# EAGLE board untitled (EAGLE 5.08)
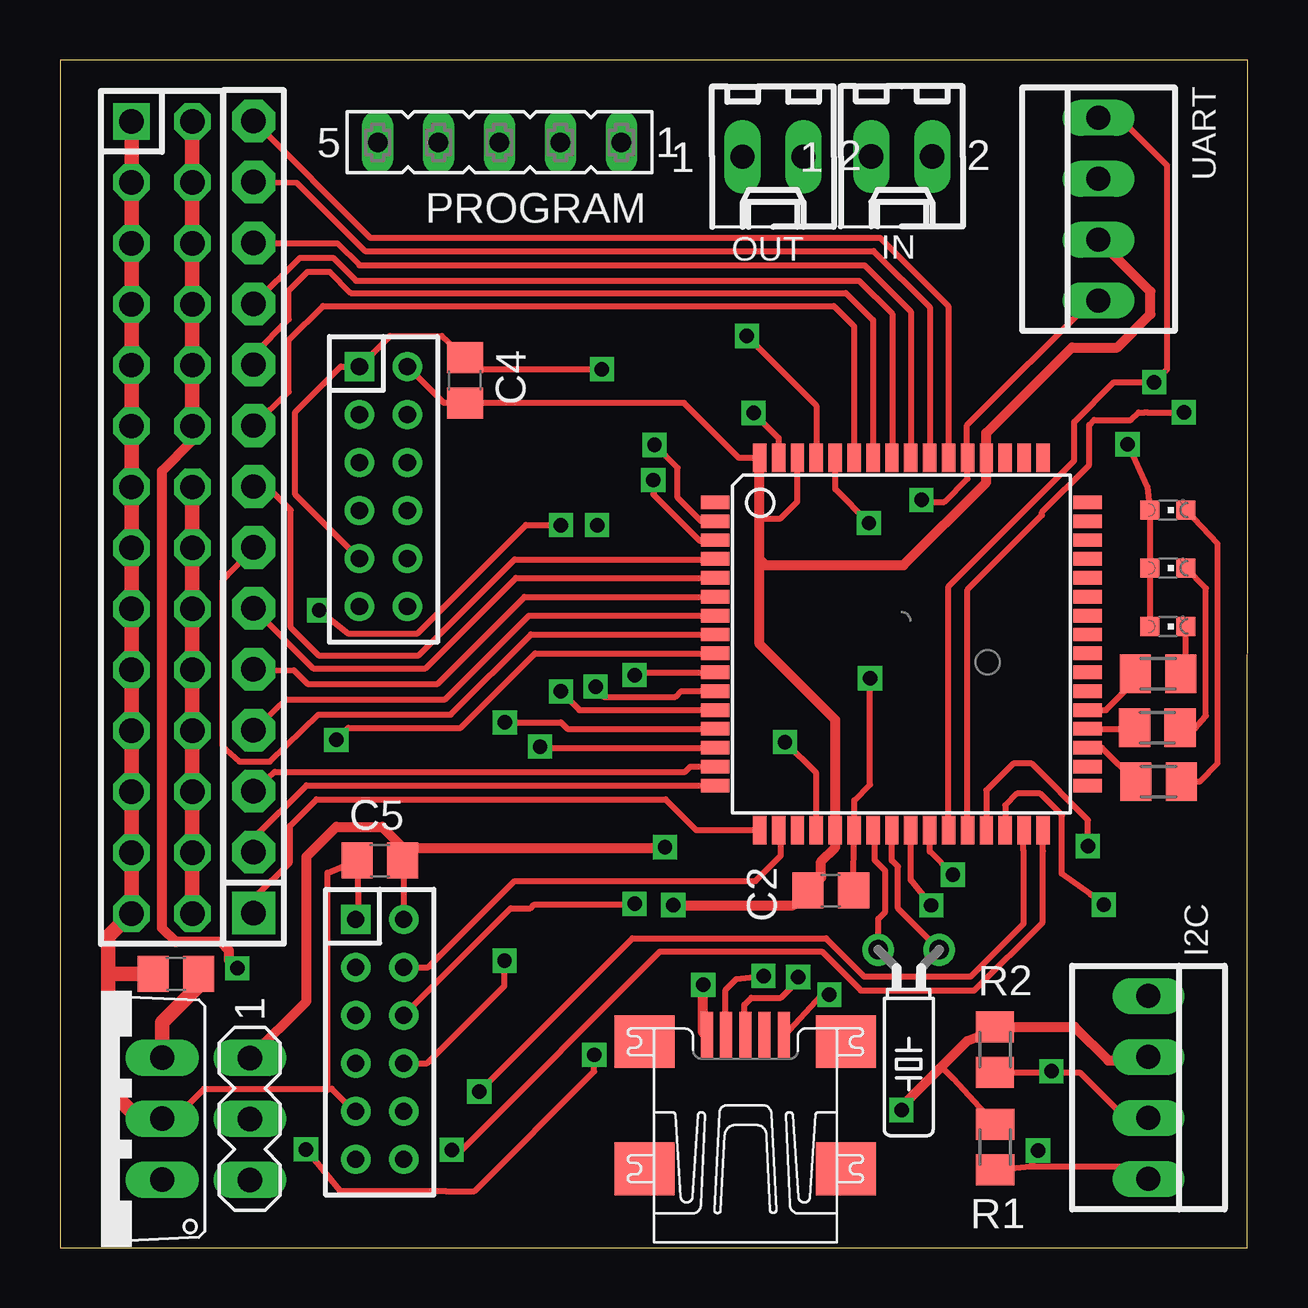
[diagram p0: board, top side]
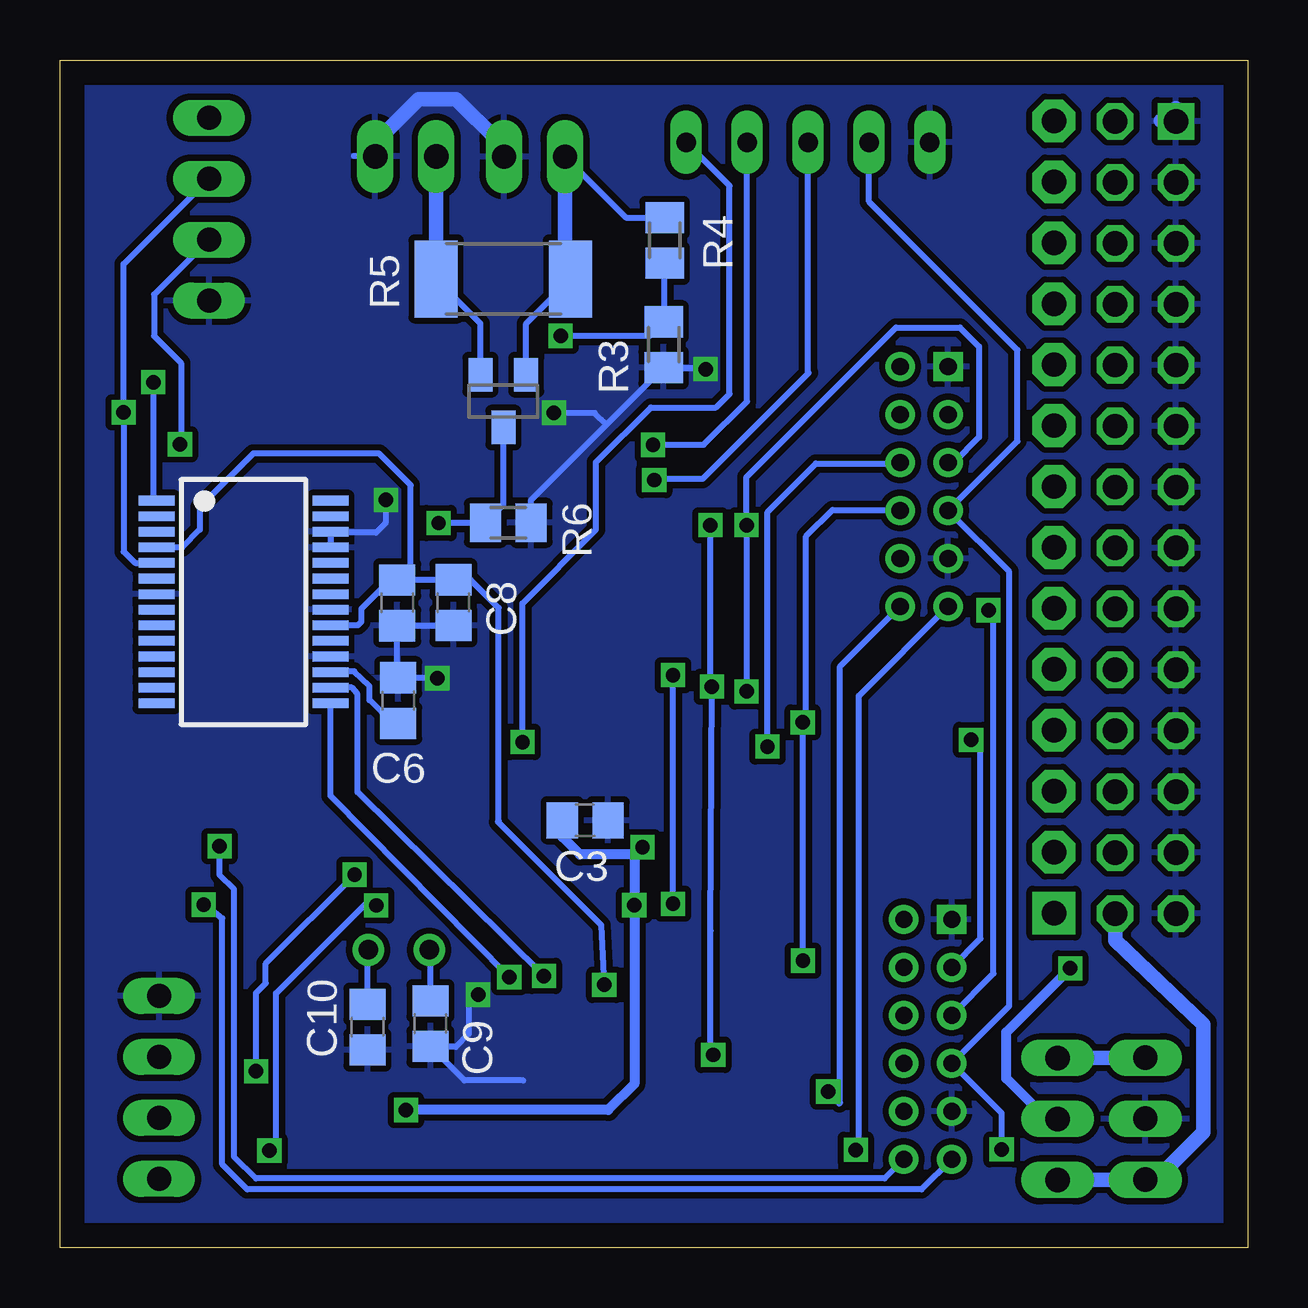
[diagram p1: board, bottom side, seen from below]

Size 49.5 x 49.51 mm. Coordinates in mm from the lower left corner, seen from the top.
Outline: 0,0.01 49.49,0 49.5,49.51 0,49.51 0,0.01
Copper layers (1*16): Top 0.035mm / dielectric 1.5mm / Bottom 0.035mm
Design rules "8mils": minimum track width 8mil, minimum drill 0.6mm, track to track 8mil, track to pad 8mil, pad to pad 8mil, via to via 8mil, smd to smd 8mil, copper to edge 40mil, drill to drill 10mil, minimum pad ring 10mil, minimum via ring 8mil, stop-mask expansion 0mil, vias tented up to drill 0mil, thermal gap 10mil

## Footprints (pad centres in the part's own frame; a part is rotated, then mirrored left to right if it is on the bottom)
C0805 = smd 1.3 x 1.5: 1 -0.95,0; 2 0.95,0
22-23-2041 = drill 1 long: 1 -3.81,0; 2 -1.27,0; 3 1.27,0; 4 3.81,0
TQFP64 = smd 1.194 x 0.559: 1 -7.76,5.905; 2 -7.76,5.118; 3 -7.76,4.331; 4 -7.76,3.543; 5 -7.76,2.756; 6 -7.76,1.968; 7 -7.76,1.181; 8 -7.76,0.394; 9 -7.76,-0.394; 10 -7.76,-1.181; 11 -7.76,-1.968; 12 -7.76,-2.756; 13 -7.76,-3.543; 14 -7.76,-4.331; 15 -7.76,-5.118; 16 -7.76,-5.905; 33 7.76,-5.905; 34 7.76,-5.118; 35 7.76,-4.331; 36 7.76,-3.543; 37 7.76,-2.756; 38 7.76,-1.968; 39 7.76,-1.181; 40 7.76,-0.394; 41 7.76,0.394; 42 7.76,1.181; 43 7.76,1.968; 44 7.76,2.756; 45 7.76,3.543; 46 7.76,4.331; 47 7.76,5.118; 48 7.76,5.905 | smd 0.559 x 1.194: 17 -5.905,-7.76; 18 -5.118,-7.76; 19 -4.331,-7.76; 20 -3.543,-7.76; 21 -2.756,-7.76; 22 -1.968,-7.76; 23 -1.181,-7.76; 24 -0.394,-7.76; 25 0.394,-7.76; 26 1.181,-7.76; 27 1.968,-7.76; 28 2.756,-7.76; 29 3.543,-7.76; 30 4.331,-7.76; 31 5.118,-7.76; 32 5.905,-7.76; 49 5.905,7.76; 50 5.118,7.76; 51 4.331,7.76; 52 3.543,7.76; 53 2.756,7.76; 54 1.968,7.76; 55 1.181,7.76; 56 0.394,7.76; 57 -0.394,7.76; 58 -1.181,7.76; 59 -1.968,7.76; 60 -2.756,7.76; 61 -3.543,7.76; 62 -4.331,7.76; 63 -5.118,7.76; 64 -5.905,7.76
TO220V = drill 1.016 long: 1 -2.54,-2.54; 2 0,-2.54; 3 2.54,-2.54
SSOP28 = smd 0.4 x 1.5: 1 -4.225,-3.625; 2 -3.575,-3.625; 3 -2.925,-3.625; 4 -2.275,-3.625; 5 -1.625,-3.625; 6 -0.975,-3.625; 7 -0.325,-3.625; 8 0.325,-3.625; 9 0.975,-3.625; 10 1.625,-3.625; 11 2.275,-3.625; 12 2.925,-3.625; 13 3.575,-3.625; 14 4.225,-3.625; 15 4.225,3.625; 16 3.575,3.625; 17 2.925,3.625; 18 2.275,3.625; 19 1.625,3.625; 20 0.975,3.625; 21 0.325,3.625; 22 -0.325,3.625; 23 -0.975,3.625; 24 -1.625,3.625; 25 -2.275,3.625; 26 -2.925,3.625; 27 -3.575,3.625; 28 -4.225,3.625
6410-02 = drill 1.016 long: 1 1.27,0; 2 -1.27,0
DIL-2MM-2X06 = drill 0.711 square: 1 -5,-1 | drill 0.711 round: 2 -5,1; 3 -3,-1; 4 -3,1; 5 -1,-1; 6 -1,1; 7 1,-1; 8 1,1; 9 3,-1; 10 3,1; 11 5,-1; 12 5,1
DIL-100-2X14 = drill 1.016 square: 1 -16.51,-1.27 | drill 1.016 octagon: 2 -16.51,1.27; 3 -13.97,-1.27; 4 -13.97,1.27; 5 -11.43,-1.27; 6 -11.43,1.27; 7 -8.89,-1.27; 8 -8.89,1.27; 9 -6.35,-1.27; 10 -6.35,1.27; 11 -3.81,-1.27; 12 -3.81,1.27; 13 -1.27,-1.27; 14 -1.27,1.27; 15 1.27,-1.27; 16 1.27,1.27; 17 3.81,-1.27; 18 3.81,1.27; 19 6.35,-1.27; 20 6.35,1.27; 21 8.89,-1.27; 22 8.89,1.27; 23 11.43,-1.27; 24 11.43,1.27; 25 13.97,-1.27; 26 13.97,1.27; 27 16.51,-1.27; 28 16.51,1.27
SIP-100-14-40 = drill 1.016 pad 1.778 square: 1 -16.51,0 | drill 1.016 pad 1.778 octagon: 2 -13.97,0; 3 -11.43,0; 4 -8.89,0; 5 -6.35,0; 6 -3.81,0; 7 -1.27,0; 8 1.27,0; 9 3.81,0; 10 6.35,0; 11 8.89,0; 12 11.43,0; 13 13.97,0; 14 16.51,0
CHIPLED_0603 = smd 0.8 x 0.8: A 0,-0.75; C 0,0.75
FE05-1 = drill 0.813 long: 1 -5.08,0; 2 -2.54,0; 3 0,0; 4 2.54,0; 5 5.08,0
TC26H = drill 0.813 round: 1 -1.27,0; 2 1.27,0
M0805 = smd 1.3 x 1.6: 1 -0.95,0; 2 0.95,0
R2512 = smd 1.8 x 3.2: 1 -2.8,0; 2 2.8,0
MA03-1 = drill 1.016 long: 1 -2.54,0; 2 0,0; 3 2.54,0
SOT23 = smd 1 x 1.4: 1 1.27,3.64; 2 2.22,1.44; 3 0.32,1.44
UX60A-MB-5ST = smd 2 x 0.5: 1 2.25,1.6; 2 2.25,0.8; 3 2.25,0; 4 2.25,-0.8; 5 2.25,-1.6 | smd 2.2 x 2.5: M1 -3.3,-4.2; M2 -3.3,4.2; M3 2,4.2; M4 2,-4.2

## Placement (x,y rotation side)
C1  [C0805]  4.83,11.42 0 top
C2  [C0805]  32.13,14.89 180 top
C3  [C0805]  27.61,17.82 180 bottom
C4  [C0805]  16.88,36.16 270 top
C5  [C0805]  13.33,16.14 0 top
C6  [C0805]  35.4,22.81 270 bottom
C7  [C0805]  35.44,26.88 90 bottom
C8  [C0805]  33.1,26.89 90 bottom
C9  18pF  [C0805]  34.06,9.34 90 bottom
C10  18pF  [C0805]  36.68,9.2 90 bottom
I2C  22-23-2041  [22-23-2041]  45.37,6.68 270 top
IC1  ATMEGA2561-16A  [TQFP64]  35.07,25.17 0 top
IC2  LM3940IT-3.3  [TO220V]  1.72,5.38 90 top
IC3  FT232RL  [SSOP28]  41.85,26.92 270 bottom
IN  22-27-2021-02  [6410-02]  35.09,45.49 180 top
J1  J-12-2MM-2X06  [DIL-2MM-2X06]  13.33,8.69 270 top
J2  J-12-2MM-2X06  [DIL-2MM-2X06]  13.48,31.73 270 top
J3  F-2X14-DIL-100  [DIL-100-2X14]  4.25,30.44 270 top
J4  F-1X14-SIP-100-40  [SIP-100-14-40]  8.07,30.46 90 top
LED1  [CHIPLED_0603]  46.18,30.75 270 top
LED2  [CHIPLED_0603]  46.18,28.33 270 top
LED3  [CHIPLED_0603]  46.18,25.9 270 top
OUT  22-27-2021-02  [6410-02]  29.72,45.48 180 top
PROGRAM  [FE05-1]  18.32,46.08 180 top
Q2  16MHz  [TC26H]  35.38,12.42 180 top
R1  [M0805]  38.98,4.2 90 top
R2  [M0805]  38.97,8.26 90 top
R3  [M0805]  24.34,37.64 270 bottom
R4  [M0805]  24.3,41.99 90 bottom
R5  [R2512]  31.02,40.38 0 bottom
R6  [M0805]  30.81,30.22 0 bottom
R7  [M0805]  45.79,19.43 180 top
R8  [M0805]  45.74,21.67 180 top
R9  [M0805]  45.77,23.93 180 top
SV2  [MA03-1]  7.91,5.37 270 top
U$2  ZXCT1009  [SOT23]  29.75,37.83 180 bottom
UART  22-23-2041  [22-23-2041]  43.29,43.29 90 top
X2  MINI-USB-UX60A-MB-5ST  [UX60A-MB-5ST]  28.57,6.59 90 top

## Library data of the parts
C1-C10 R1-R9 = rcl
I2C IN OUT UART = con-molex
IC1 = avr
IC2 = linear
IC3 = ftdichip
J1-J4 = con-headers-jp
LED1-LED3 = led
PROGRAM = con-lsta
Q2 = crystal
SV2 = con-lstb
U$2 = dla
X2 = con-hirose

## Nets
+3V3: C1.2 C2.2 C3.2 C4.2 C5.2 I2C.2 IC1.21 IC1.52 IC1.62 IC1.64 IC2.3 J1.2 J2.2 LED1.A LED2.A LED3.A R1.2 R2.2 SV2.1 UART.2
+5V: IC2.1 J3.14 J3.16 J3.18 J3.20 J3.22 J3.24 J3.26 J3.28 SV2.3
GND: C1.1 C2.1 C3.1 C4.1 C5.1 C6.1 C7.1 C8.1 C9.1 C10.1 I2C.1 IC1.22 IC1.53 IC1.63 IC2.2 IC3.7 IC3.18 IC3.21 IC3.25 IC3.26 IN.2 J1.1 J1.9 J2.1 J2.9 J3.1 J3.3 J3.5 J3.7 J3.9 J3.11 J3.13 J3.15 J3.17 J3.19 J3.21 J3.23 J3.25 J3.27 OUT.2 PROGRAM.5 R3.2 R6.2 UART.1 X2.5
N$1: IC1.3 PROGRAM.3
N$2: IC1.12 J1.5 J2.5
N$3: IC1.9 J1.3
N$4: IC1.18 J1.4
N$5: IC1.10 J1.6
N$6: IC1.2 PROGRAM.2
N$7: I2C.3 IC1.26 R2.1
N$8: IC1.14 J2.6
N$9: IC1.11 J1.7 J2.7 PROGRAM.4
N$10: I2C.4 IC1.25 R1.1
N$11: C9.2 IC1.23 Q2.2
N$12: IC1.4 J4.8
N$13: IC1.28 IC3.5 UART.3
N$14: IC1.17 J4.1
N$15: IC1.16 J4.2
N$16: IC1.15 J4.3
N$17: IC1.8 J4.7
N$18: IC1.7 J4.4
N$19: IC1.6 J4.5
N$20: IC1.61 R3.1 R4.1
N$21: IN.1 R5.1 U$2.2
N$22: IC1.58 J4.10
N$23: IC1.60 R6.1 U$2.1
N$24: OUT.1 R4.2 R5.2 U$2.3
N$25: IC1.59 J4.9
N$26: IC1.29 J1.12
N$27: IC1.30 J1.11
N$28: IC1.57 J4.11
N$29: IC1.56 J4.12
N$30: IC1.31 J2.12
N$31: IC1.55 J4.13
N$32: IC1.54 J4.14
N$33: IC1.27 IC3.1 UART.4
N$34: IC1.32 J2.11
N$35: IC1.20 PROGRAM.1
N$36: IC1.13 J1.8 J2.8
N$37: IC3.15 X2.3
N$38: J3.2 J3.4 J3.6 J3.8 J3.10 J3.12 SV2.2
N$39: C10.2 IC1.24 Q2.1
N$40: C7.2 C8.2 IC3.4 IC3.20 X2.1
N$41: C6.2 IC3.17
N$42: IC3.16 X2.2
N$43: IC1.35 R7.2
N$44: IC1.5 J4.6
N$45: LED1.C R7.1
N$46: LED2.C R8.1
N$47: LED3.C R9.1
N$48: IC1.36 R8.2
N$49: IC1.37 R9.2

## Tracks (layer width: path | path; a pad name or v marks a point on that pad's centre or on a via)
+3V3  (via drill 0.6)
  Top 0.203: C5.2 14.33,16.15
  Top 0.254: J2.2 16,35.21 C4.2 26.02,35.21 28.31,32.92 IC1.64 | 14.33,16.65 14.33,16.15 J1.2 | C5.2 14.61,16.67 | IC1.21 32.3,17.4 | C2.2 31.18,14.46 | 38.53,9.21 38.6,9.21 R2.2 | R1.2 38.8,5.29 | R1.2 38.68,5.29 | R1.2 37.23,7.06 37.22,7.06 36.78,7.5 36.77,7.56 | IC1.62 30.74,31.1 30.04,30.4 29.2,30.4 29.16,30.43 | v44.5,33.49 45.33,31.71 LED1.A LED2.A LED3.A
  Top 0.406: 14.33,16.65 13.43,17.55 11.52,17.55 10.28,16.31 10.28,10.28 SV2.1 | 14.61,16.67 25.19,16.67 v25.22,16.7 | v25.56,14.28 30.57,14.28 C2.2 31.72,15.43 31.72,16.1 32.31,16.69 IC1.21 32.32,22.01 29.16,25.17 29.16,28.7 | 38.6,9.21 38.6,8.95 | I2C.2 44.54,7.81 43.69,7.81 42.29,9.21 R2.2 38.45,8.88 37.82,8.62 36.77,7.56 34.94,5.74 v35.08,5.74 | 29.16,28.7 29.16,30.43 IC1.64 | 29.16,28.7 29.41,28.45 35.16,28.45 38.61,31.9 IC1.52 38.61,33.96 42.18,37.53 44.07,37.53 45.45,38.91 45.45,39.86 UART.2
  Top 0.61: C1.2 5.78,10.92 4.26,9.4 IC2.3
  Bottom 0.203: 25.59,16.23 v25.22,16.7
  Bottom 0.254: C3.2 28.56,17.15 | 25.56,16.25 25.59,16.23 25.59,16.22 | UART.2 45.58,39.73 45.58,38.01 44.45,36.88 44.45,33.45 v44.5,33.49
  Bottom 0.406: v25.22,16.7 25.53,16.39 | 25.53,16.39 27.83,16.39 28.56,17.12 C3.2 | 25.53,16.39 25.56,16.36 v25.56,14.28 25.56,6.83 26.65,5.74 v35.08,5.74
  Bottom 0.61: IC2.3 SV2.1
+5V
  Top 0.203: J3.24 | J3.20 | J3.22 | J3.18 | J3.16
  Top 0.61: J3.28 J3.26 J3.24 J3.22 J3.20 J3.18 J3.16 J3.14
  Bottom 0.61: J3.28 5.52,12.82 1.84,9.32 1.84,4.82 3.82,2.84 IC2.1 SV2.3
GND  (via drill 0.6)
  Top 0.254: IC1.63 29.95,33.76 v28.91,34.8 | UART.1 43,39.48 37.81,34.29 37.81,32.95 IC1.53 37.83,32.06 36.86,31.09 35.99,31.09 v35.91,31.17 | 11.15,6.57 11.15,15.63 C5.1 12.45,13.81 J1.1 | C2.1 33.09,17.4 IC1.22 33.11,18.65 33.77,19.31 v33.77,23.74 | 30.21,8.96 X2.5 31.74,10.55 v32.07,10.55 | J2.9 9.81,31.39 9.81,34.84 11.7,36.73 J2.1 13.76,38.01 15.91,38.01 C4.1 17.28,36.64 17.3,36.62 v22.59,36.62 | IC2.2 4.76,5.38 6.01,6.63 11.33,6.63 12.27,5.69 J1.9
  Top 0.61: J3.1 J3.25 J3.27 2.02,12.97 2.02,11.44 | 2.02,7.81 2.02,11.44 | IC2.2 3.29,5.38 2.02,6.65 2.02,7.93 2,7.95 | C1.1 2.04,11.42 2.02,11.44
  Bottom 0.254: R6.2 29.86,31.17 26.72,34.31 | 26.72,34.31 R3.2 22.21,36.69 | v28.91,34.8 27.21,34.8 26.72,34.31 | IN.2 37.26,45.51 | C8.1 C7.1 35.44,23.8 C6.1 35.38,23.74 v33.77,23.74 | IC3.25 IC3.26 38.19,29.81 36.33,29.81 35.91,30.23 v35.91,31.17 | 30.18,6.97 32.64,6.97 C9.1 | v32.07,10.55 32.03,10.63 32.46,10.2 32.46,8.91 33,8.37 34.03,8.37 34.05,8.35 34.13,8.35 | v22.59,36.62 22.62,36.65 24.33,36.65
  Bottom 0.61: IN.2 36.36,46.07 34.55,47.88 32.99,47.88 31.25,46.14 31.25,45.74 OUT.2 | J3.1 2.98,47.51 | 3.61,46.98 2.99,46.98 | 13.19,46.59 13.19,46.08
  pour Bottom (isolate 0.254): 0.07,49.93 0.07,0.14 50.01,0.14 50.01,49.93 49.75,49.93
N$1  (via drill 0.6)
  Top 0.254: v24.73,32 24.73,31.4 26.66,29.47 27.28,29.47 IC1.3
  Bottom 0.254: v24.73,32 24.68,32.05 22.71,32.05 18.29,36.47 18.32,36.5 PROGRAM.3
N$2  (via drill 0.6)
  Top 0.254: IC1.12 21.66,22.41 v20.88,23.19 | v10.8,26.57 12.01,25.61 14.91,25.61 19.43,30.12 v20.88,30.12
  Bottom 0.254: J1.5 10.59,11.43 10.59,26.33 | 10.59,26.33 10.59,26.55 | v20.88,23.19 v20.88,30.12 v20.89,30.13 20.89,32.12 14.65,38.36 11.98,38.36 11.19,37.57 11.19,33.79 12.25,32.73 J2.5 | v10.8,26.57 10.75,26.49 10.59,26.33
N$3  (via drill 0.6)
  Top 0.254: IC1.9 19.81,24.78 16.7,21.67 12.02,21.67 v11.52,21.17
  Bottom 0.254: J1.3 11.13,12.89 11.13,20.73 11.52,21.12 v11.52,21.17
N$4
  Top 0.254: J1.4 15.35,11.69 18.95,15.29 28.99,15.29 30.05,16.35 30.05,17.31 IC1.18
N$5  (via drill 0.6)
  Top 0.254: IC1.10 24.07,23.99 v23.95,23.87 | J1.6 18.79,14.15 19.61,14.15 19.77,14.31 23.92,14.31 v23.95,14.34
  Bottom 0.254: v23.95,14.34 v23.95,23.87
N$6  (via drill 0.6)
  Top 0.254: IC1.2 26.72,30.29 25.74,31.27 25.74,32.51 v24.78,33.47
  Bottom 0.254: v24.78,33.47 22.67,33.47 20.86,35.28 PROGRAM.2
N$7  (via drill 0.6)
  Top 0.254: IC1.26 36.25,16.52 v37.22,15.55 | R2.1 41.33,7.31 | 41.33,7.31 42.5,7.31 44.4,5.41 I2C.3 | 41.33,7.31 v41.33,7.36
  Bottom 0.254: v37.22,15.55 40.92,11.85 40.92,11.03 41.33,10.62 v41.33,7.36
N$8  (via drill 0.6)
  Top 0.254: IC1.14 20.06,20.84 v20.01,20.89
  Bottom 0.254: J2.6 14.52,32.69 17.99,32.69 20.01,30.67 v20.01,20.89
N$9  (via drill 0.6)
  Top 0.254: v22.33,23.39 22.67,22.96 25.65,22.96 25.89,23.2 IC1.11 | v10.25,4.1 11.67,2.37 16.07,2.37 16.08,2.36 17.28,2.36 22.27,7.35 v22.27,8.04
  Bottom 0.254: v22.39,30.12 22.39,23.26 v22.33,23.39 22.38,13.21 22.38,8.03 v22.27,8.04 | v10.25,4.1 10.25,5.61 J1.7 9.93,10.08 9.93,28.18 J2.7 9.59,33.62 9.59,37.42 15.78,43.61 PROGRAM.4
N$10  (via drill 0.6)
  Top 0.254: IC1.25 35.46,15.33 v36.32,14.27 | R1.1 40.46,3.39 | 40.46,3.39 v40.77,4.05 | 40.46,3.39 44.85,3.39 I2C.4
  Bottom 0.254: v36.32,14.27 36.72,14.38 40.49,10.61 40.49,4.06 v40.77,4.05
N$11
  Top 0.254: Q2.2 34.11,13.71 34.4,14 34.4,15.71 33.96,16.15 33.96,17.34 IC1.23
  Bottom 0.254: C9.2 34.06,12.37 Q2.2
N$12
  Top 0.254: IC1.4 27.29,28.69 18.95,28.69 14.95,24.69 10.78,24.69 9.62,25.85 9.62,30.74 8.67,31.69 J4.8
N$13  (via drill 0.6)
  Top 0.203: 45.33,34.83 45.33,34.82 45.32,34.83 45.21,34.82
  Top 0.254: IC1.28 37.83,27.44 40.93,30.54 40.93,30.66 42.9,32.63 42.9,34.3 43.1,34.5 44.64,34.5 44.96,34.82 45.21,34.82 | v46.85,34.82 45.33,34.82 45.29,34.82
  Bottom 0.254: UART.3 46.85,41 v46.85,34.82 46.85,29.02 46.38,28.55 IC3.5
N$14
  Top 0.254: J4.1 8.1,14.58 9.59,16.07 9.59,17.59 10.69,18.69 25.24,18.69 26.52,17.41 IC1.17
N$15
  Top 0.254: J4.2 8.1,17.1 10.28,19.28 27.3,19.28 IC1.16
N$16
  Top 0.254: IC1.15 26.27,20.05 26.06,19.84 8.95,19.84 J4.3
N$17
  Top 0.254: IC1.8 19.63,25.56 16.29,22.22 10.78,22.22 8.76,20.27 7.48,20.27 6.79,20.89 6.79,27.84 J4.7
N$18
  Top 0.254: IC1.7 19.55,26.35 16.06,22.86 9.43,22.86 J4.4
N$19
  Top 0.254: J4.5 9.76,24.07 10.32,23.51 15.74,23.51 19.36,27.13 IC1.6
N$20  (via drill 0.6)
  Top 0.254: IC1.61 31.53,35.11 v28.63,38.01
  Bottom 0.254: R4.1 24.3,38.63 R3.1 24.92,38.01 v28.63,38.01
N$21
  Bottom 0.254: U$2.2 31.97,38.53 R5.1
  Bottom 0.61: R5.1 IN.1
N$22
  Top 0.254: J4.10 8.1,37.26 9.54,38.7 9.54,39.9 10.32,40.68 11.24,40.68 12.12,39.8 32.76,39.8 33.89,38.67 IC1.58
N$23  (via drill 0.6)
  Top 0.254: IC1.60 32.31,31.62 v33.72,30.21
  Bottom 0.254: U$2.1 31.02,30.96 R6.1 v33.72,30.21
N$24
  Bottom 0.254: R4.2 25.91,42.94 OUT.1 | U$2.3 30.07,38.53 R5.2
  Bottom 0.61: OUT.1 28.45,40.61 R5.2
N$25
  Top 0.254: J4.9 9.54,35.67 9.54,37.83 10.96,39.25 32.26,39.25 33.1,38.41 IC1.59
N$26  (via drill 0.6)
  Top 0.254: IC1.29 38.61,19.06 39.73,20.18 40.5,20.18 42.85,17.83 v42.85,16.74
  Bottom 0.254: v42.85,16.74 42.85,15.55 42.25,14.95 42.25,3.8 42.24,3.8 41.33,2.89 15.13,2.89 J1.12
N$27  (via drill 0.6)
  Top 0.254: IC1.30 39.4,18.44 39.89,18.93 40.86,18.93 41.77,18.02 41.76,18 41.76,15.59 42.96,14.72 v43.51,14.3
  Bottom 0.254: v43.51,14.3 43.04,13.96 42.73,13.73 42.73,3.47 41.69,2.43 13.59,2.43 J1.11
N$28
  Top 0.254: J4.11 8.1,39.37 10,41.27 11.38,41.27 12.34,40.31 33.31,40.31 34.69,38.93 34.69,32.94 IC1.57
N$29
  Top 0.254: IC1.56 35.46,39.03 33.54,40.95 12.48,40.95 11.56,41.87 8.12,41.87 J4.12
N$30  (via drill 0.6)
  Top 0.254: IC1.31 40.15,17.37 40.15,16.58 40.17,16.56 40.17,13.52 37.96,11.31 33.52,11.31 31.93,12.9 23.86,12.9 v17.48,6.52 v17.48,6.51
  Bottom 0.254: J2.12 16.98,24.23 16.98,6.06 17.02,6.02 17.02,6.05 v17.48,6.51
N$31
  Top 0.254: J4.13 9.87,44.39 12.71,41.55 33.91,41.55 36.25,39.21 IC1.55
N$32
  Top 0.254: IC1.54 37.03,39.25 34.18,42.1 12.93,42.1 J4.14
N$33  (via drill 0.6)
  Top 0.254: UART.4 44.16,47.1 46.15,45.11 46.15,36.62 v45.61,36.08 43.93,36.08 42.27,34.42 42.27,32.8 37.04,27.57 IC1.27
  Bottom 0.254: IC3.1 45.61,31.28 v45.61,36.08
N$34  (via drill 0.6)
  Top 0.254: IC1.32 40.98,16.53 40.96,16.51 40.96,13.57 38.11,10.72 33.38,10.72 31.75,12.35 25.01,12.35 16.75,4.09 16.29,4.09 v16.33,4.08
  Bottom 0.254: J2.11 16.2,23.01 16.2,4.21 v16.33,4.08
N$35  (via drill 0.6)
  Top 0.254: IC1.20 31.53,19.78 v30.22,21.08
  Bottom 0.254: v30.22,21.08 30.22,26.86 27.16,29.93 27.16,32.74 24.87,35.03 22.15,35.03 21.59,35.59 21.59,44.27 PROGRAM.1
N$36  (via drill 0.6)
  Top 0.254: IC1.13 21.15,21.63 20.88,21.9 v18.54,21.9 | J1.8 15.31,7.69 18.53,10.91 v18.53,11.97
  Bottom 0.254: J2.8 14.51,30.76 17.3,30.76 18.4,29.66 18.4,21.95 18.45,21.9 v18.54,21.9 v18.54,11.98 v18.53,11.97
N$37  (via drill 0.6)
  Top 0.203: X2.3 28.55,8.97 28.53,8.97
  Top 0.254: 28.53,8.96 28.53,8.97 28.53,10.13 28.82,10.42 30.05,10.42 30.57,10.94 v30.77,11.28
  Bottom 0.254: v30.77,11.28 38.23,18.84 IC3.15
N$38  (via drill 0.6)
  Top 0.203: J3.10 | J3.6 | J3.8 | J3.4
  Top 0.406: J3.12 5.52,33.64 4.26,32.38 4.26,13.32 4.84,12.74 6.69,12.74 7.05,12.38 7.05,11.99 v7.39,11.65
  Top 0.61: J3.12 J3.10 J3.8 J3.6 J3.4 J3.2
  Bottom 0.406: SV2.2 8.37,5.37 10.06,7.06 10.06,8.98 v7.39,11.65
N$39
  Top 0.254: IC1.24 34.68,16.14 34.93,15.89 34.93,14.14 Q2.1
  Bottom 0.254: C10.2 36.68,12.39 Q2.1
N$40  (via drill 0.6)
  Top 0.254: v26.81,10.96 26.97,10.92
  Top 0.406: X2.1 26.81,8.96 v26.81,10.96
  Bottom 0.254: v26.81,10.96 26.93,13.44 31.25,17.76 31.21,17.8 31.21,26.67 32.38,27.84 C8.2 C7.2 | C7.2 35.74,27.83 36.94,26.63 36.94,26.09 37.09,25.95 IC3.20 | C7.2 34.88,28.39 34.88,31.79 36.2,33.11 41.44,33.11 43.67,30.88 43.67,29.93 44.41,29.2 IC3.4
N$41
  Bottom 0.254: C6.2 35.64,21.86 36.6,22.83 36.6,23.41 37.23,24.03 38.19,24.03 IC3.17
N$42  (via drill 0.6)
  Top 0.203: X2.2 27.75,8.97 27.74,8.97
  Top 0.254: 27.74,8.95 27.74,8.97 27.74,10.75 28.19,11.2 v29.33,11.33
  Bottom 0.254: v29.33,11.33 37.1,18.99 37.1,23.08 37.33,23.35 IC3.16
N$43
  Top 0.254: IC1.35 43.43,20.84 R7.2
N$44
  Top 0.254: IC1.5 19.01,27.93 15.23,24.15 10.56,24.15 J4.6
N$45
  Top 0.254: R7.1 47.51,19.43 48.25,20.2 48.25,29.34 LED1.C
N$46
  Top 0.254: R8.1 46.72,21.64 47.31,21.64 47.77,22.17 47.77,27.48 LED2.C
N$47
  Top 0.254: R9.1 46.93,23.93 LED3.C
N$48
  Top 0.254: IC1.36 44.75,21.63 R8.2
N$49
  Top 0.254: IC1.37 43.59,22.41 44.37,23.19 44.37,23.48 R9.2